# EAGLE board Qwiic AHT20 Breakout (EAGLE 9.6.2)
REVISION: A
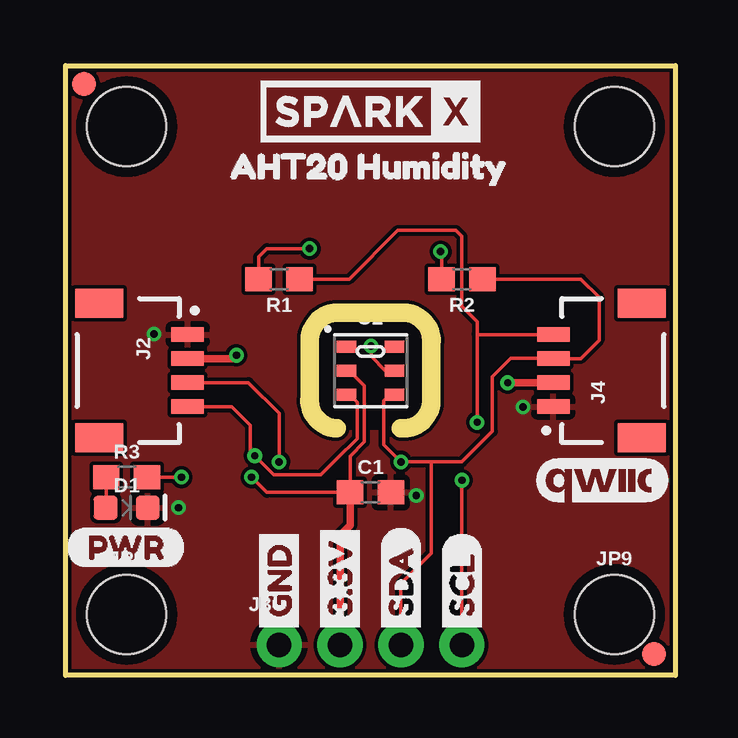
[diagram p0: board, top side]
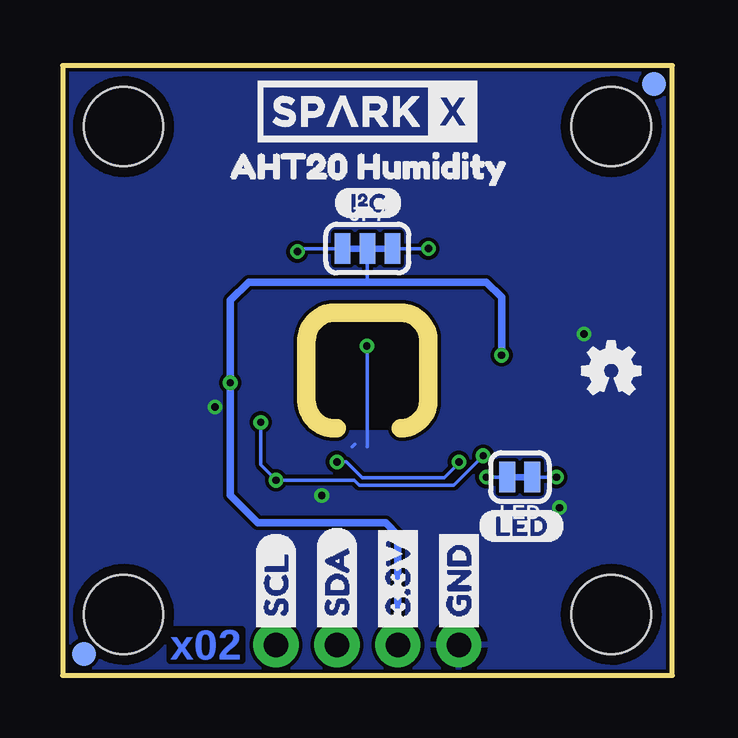
[diagram p1: board, bottom side, seen from below]

Size 25.4 x 25.4 mm. Coordinates in mm from the lower left corner, seen from the top.
Outline: 13.97,10.29 arc92 15.24,11.43 15.24,13.84 arc92 14.1,15.11 11.43,15.11 arc92 10.16,13.97 10.16,11.56 arc92 11.3,10.29
Outline: 0,0 0,25.4 25.4,25.4 25.4,0 0,0
Copper layers (1*16): Top 0.035mm / dielectric 1.5mm / Bottom 0.035mm
Design rules "SparkFun-2-layer-PCBWay-LIMIT": minimum track width 6mil, minimum drill 0.3mm, track to track 6mil, track to pad 6mil, pad to pad 6mil, via to via 6mil, smd to smd 6mil, copper to edge 6mil, drill to drill 6mil, minimum pad ring 6mil, minimum via ring 6mil, stop-mask expansion 4mil, vias tented up to drill 25mil, thermal gap 10mil
Net classes: 1 power: width 0.203 mm

## Footprints (pad centres in the part's own frame; a part is rotated, then mirrored left to right if it is on the bottom)
0603 = smd 1.1 x 1: 1 -0.85,0; 2 0.85,0
LED-0603 = smd 1 x 1: A -0.877,0; C 0.877,0
JST04_1MM_RA = smd 0.6 x 1.35: 1 -1.5,0; 2 -0.5,0; 3 0.5,0; 4 1.5,0 | smd 1.2 x 2: NC1 2.8,-3.675; NC2 -2.8,-3.675
1X04_NO_SILK = drill 1.016 pad 1.88: 1 0,0; 2 2.54,0; 3 5.08,0; 4 7.62,0
FIDUCIAL-1X2 = smd 1 x 1: 1 0,0
STAND-OFF = hole 3.302: 0,0
SMT-JUMPER_3_2-NC_TRACE_SILK = smd 0.66 x 1.27: 1 -1.041,0; 2 0,0; 3 1.041,0
SMT-JUMPER_2_NC_TRACE_SILK = smd 0.66 x 1.27: 1 -0.521,0; 2 0.521,0
QFN-6 = smd 0.8 x 0.5: ADR -1,1; GND 1,0; NC2 1,1; SCL -1,-1; SDA 1,-1; VDD -1,0

## Placement (x,y rotation side)
C1  0.1uF  [0603]  12.7,7.62 0 top
D1  RED  [LED-0603]  2.54,6.99 0 top
FRAME1  FRAME-LETTER  [CREATIVE_COMMONS]  -12.7,-19.05 0 top  (outside the outline)
J2  QWIIC_RIGHT_ANGLE  [JST04_1MM_RA]  5.08,12.7 270 top
J3  PTH  [1X04_NO_SILK]  8.89,1.27 0 top
J4  QWIIC_RIGHT_ANGLE  [JST04_1MM_RA]  20.32,12.7 90 top
JP1  FIDUCIAL1X2  [FIDUCIAL-1X2]  0.76,24.64 0 bottom
JP2  FIDUCIAL1X2  [FIDUCIAL-1X2]  24.51,0.89 0 top
JP3  STAND-OFF  [STAND-OFF]  2.54,22.86 0 top
JP4  STAND-OFF  [STAND-OFF]  22.86,22.86 0 top
JP5  FIDUCIAL1X2  [FIDUCIAL-1X2]  24.51,0.89 0 bottom
JP6  FIDUCIAL1X2  [FIDUCIAL-1X2]  0.76,24.64 0 top
JP7  JUMPER-SMT_3_2-NC_TRACE_SILK  [SMT-JUMPER_3_2-NC_TRACE_SILK]  12.7,17.78 0 bottom
JP8  STAND-OFF  [STAND-OFF]  2.54,2.54 0 top
JP9  STAND-OFF  [STAND-OFF]  22.86,2.54 0 top
LED  JUMPER-SMT_2_NC_TRACE_SILK  [SMT-JUMPER_2_NC_TRACE_SILK]  6.35,8.26 180 bottom
LOGO1  OSHW-LOGOMINI  [OSHW-LOGO-MINI]  2.54,12.7 0 bottom
R1  2.2k  [0603]  8.89,16.51 180 top
R2  2.2k  [0603]  16.51,16.51 180 top
R3  1k  [0603]  2.54,8.26 0 top
U2  AHT20QFN-6  [QFN-6]  12.7,12.7 0 top
U$1  SPARKX-LOGO4  [SPARKX-MEDIUM]  12.7,23.5 0 top
U$2  SPARKX-LOGO4  [SPARKX-MEDIUM]  12.7,23.5 0 bottom
U$3  [GND1]  8.89,1.52 90 bottom
U$4  [3#3V2]  11.43,1.52 90 bottom
U$5  [SDA8]  13.97,1.52 90 bottom
U$6  [SCL9]  16.51,1.52 90 bottom
U$8  [AHT20_HUMIDITY2]  19.3,21.21 0 bottom
U$9  [I_SUPER2_C-()-03]  14.1,19.68 0 bottom
U$10  [(PWR)]  0,5.33 0 top
U$11  [QWIIC_5.5MM]  22.35,8.13 0 top
U$12  [LED_32]  8.13,6.22 0 bottom
U$14  [AHT20_HUMIDITY2]  5.97,21.21 0 top
U$18  [ORDERING_INSTRUCTIONS]  39.37,50.8 0 top  (outside the outline)
U$21  [3#3V2]  11.43,1.52 90 top
U$22  [GND1]  8.89,1.52 90 top
U$26  [SCL9]  16.51,1.52 90 top
U$27  [SDA8]  13.97,1.52 90 top

## Library data of the parts
C1 = SparkFun-Capacitors; PROD_ID: CAP-00810
D1 = SparkFun-LED; PROD_ID: DIO-00819
FRAME1 JP1 JP2 JP5 JP6 LOGO1 U$11 U$18 = SparkFun-Aesthetics
J2 J4 = SparkFun-Connectors; PROD_ID: CONN-13694
J3 U$1 U$2 = SparkX
JP3 JP4 JP8 JP9 = SparkFun-Hardware
JP7 LED = SparkFun-Jumpers
R1 R2 = SparkFun-Resistors; PROD_ID: RES-08272
R3 = SparkFun-Resistors; PROD_ID: RES-07856
U2 = AHT20; PROD_ID: IC-
U$3-U$6 U$10 U$21 U$22 U$26 U$27 = Labels-0_04
U$8 U$14 = buzzard_labels (17)
U$9 = Labels
U$12 = SparkFun-Buzzard

## Nets
3.3V: C1.1 J2.2 J3.2 J4.2 JP7.2 LED.2 U2.VDD
GND: C1.2 D1.C J2.1 J3.1 J4.1 U2.GND
N$1: JP7.3 R1.2
N$2: JP7.1 R2.2
N$3: D1.A R3.1
N$4: LED.1 R3.2
SCL: J2.4 J3.4 J4.4 R1.1 U2.SCL
SDA: J2.3 J3.3 J4.3 R2.1 U2.SDA

## Tracks (layer width: path | path; a pad name or v marks a point on that pad's centre or on a via)
3.3V  (via drill 0.3)
  Top 0.152: U2.VDD 11.81,12.7 12.45,12.06 12.45,9.73 11.85,9.13 C1.1 8.38,7.62 v7.75,8.26
  Top 0.305: J2.2 6.98,13.2 v7.11,13.34 | v18.41,12.19 J4.2 | J3.2 11.43,5.84 11.85,6.26 C1.1
  Bottom 0.152: LED.2 v7.75,8.26 | JP7.2 12.7,16.38
  Bottom 0.305: v7.11,13.34 7.11,15.75 7.75,16.38 12.7,16.38 17.65,16.38 18.41,15.62 v18.41,12.19 18.41,7.49 17.27,6.35 11.94,6.35 11.43,5.84 J3.2
GND  (via drill 0.3)
  Top 0.152: U2.GND 13.32,12.7 12.72,13.29 v12.72,13.72
  Bottom 0.152: 13.23,9.63 13.34,9.53 | v12.72,13.72 12.7,13.69 12.7,9.53
  other vias: 14.61,7.49 19.05,11.18 4.7,6.99 3.68,14.22
  pour Bottom (isolate 0.152): 0,0 0,25.4 25.4,25.4 25.4,0
  pour Top (isolate 0.152): 0,0 0,25.4 25.4,25.4 25.4,0
N$1  (via drill 0.3)
  Top 0.152: R1.2 8.04,17.44 8.38,17.78 v10.16,17.78
  Bottom 0.152: JP7.3 v10.16,17.78
N$2  (via drill 0.3)
  Top 0.152: v15.62,17.65 15.66,17.61 R2.2
  Bottom 0.152: JP7.1 15.49,17.78 v15.62,17.65
N$3
  Top 0.152: R3.1 1.69,7.01 D1.A
N$4  (via drill 0.3)
  Top 0.152: R3.2 v4.83,8.26
  Bottom 0.152: LED.1 v4.83,8.26
N$6
  cutout Bottom (isolate 0.305): 10.41,14.86 14.99,14.86 14.99,10.29 10.41,10.29
  cutout Top (isolate 0.305): 14.99,14.86 10.41,14.86 10.41,10.29 14.99,10.29
SCL  (via drill 0.3)
  Top 0.152: U2.SCL 11.82,11.7 12.14,11.38 12.14,9.86 11.3,9.02 11.29,9.02 10.63,8.36 8.67,8.36 v7.88,9.15 7.7,9.33 7.7,10.41 6.91,11.2 J2.4 | 17.14,14.22 17.14,14.73 16.51,15.37 16.51,18.29 16.26,18.54 13.84,18.54 11.81,16.51 R1.1 | 17.14,14.22 v17.14,10.54 | 17.14,14.22 17.17,14.2 J4.4 | J3.4 v16.51,8.13
  Bottom 0.152: v17.14,10.54 17.14,8.76 v16.51,8.13 13.25,8.13 13.05,7.92 9.1,7.92 v7.88,9.15
SDA  (via drill 0.3)
  Top 0.152: J2.3 7.61,12.2 8.89,10.92 v8.89,8.89 | 15.24,8.89 v13.97,8.89 13.26,9.6 13.26,9.65 13.26,10.16 13.26,11.43 13.53,11.7 U2.SDA | 15.24,8.89 16.51,8.89 17.78,10.16 17.78,12.45 18.54,13.21 J4.3 21.45,13.2 22.23,13.97 22.23,15.75 21.46,16.51 R2.1 | J3.3 13.97,3.81 15.24,5.08 15.24,8.89
  Bottom 0.152: v13.97,8.89 13.58,8.89 12.92,8.23 9.5,8.23 8.89,8.84 v8.89,8.89

## Text on the board
Bottom: x02
Measures: Dimensions in inches
tDocu: 0.8mm Thickness